# Altium PCB Copy of PCB1.PcbDoc
Units mil, origin at the board's own origin, x right, y up, seen from the top; angles counter-clockwise.
Board outline 6000 x 4000 mil, 2 copper layers (Top Layer, Bottom Layer); 12 components, 9 nets, 25 pads, 1 vias.
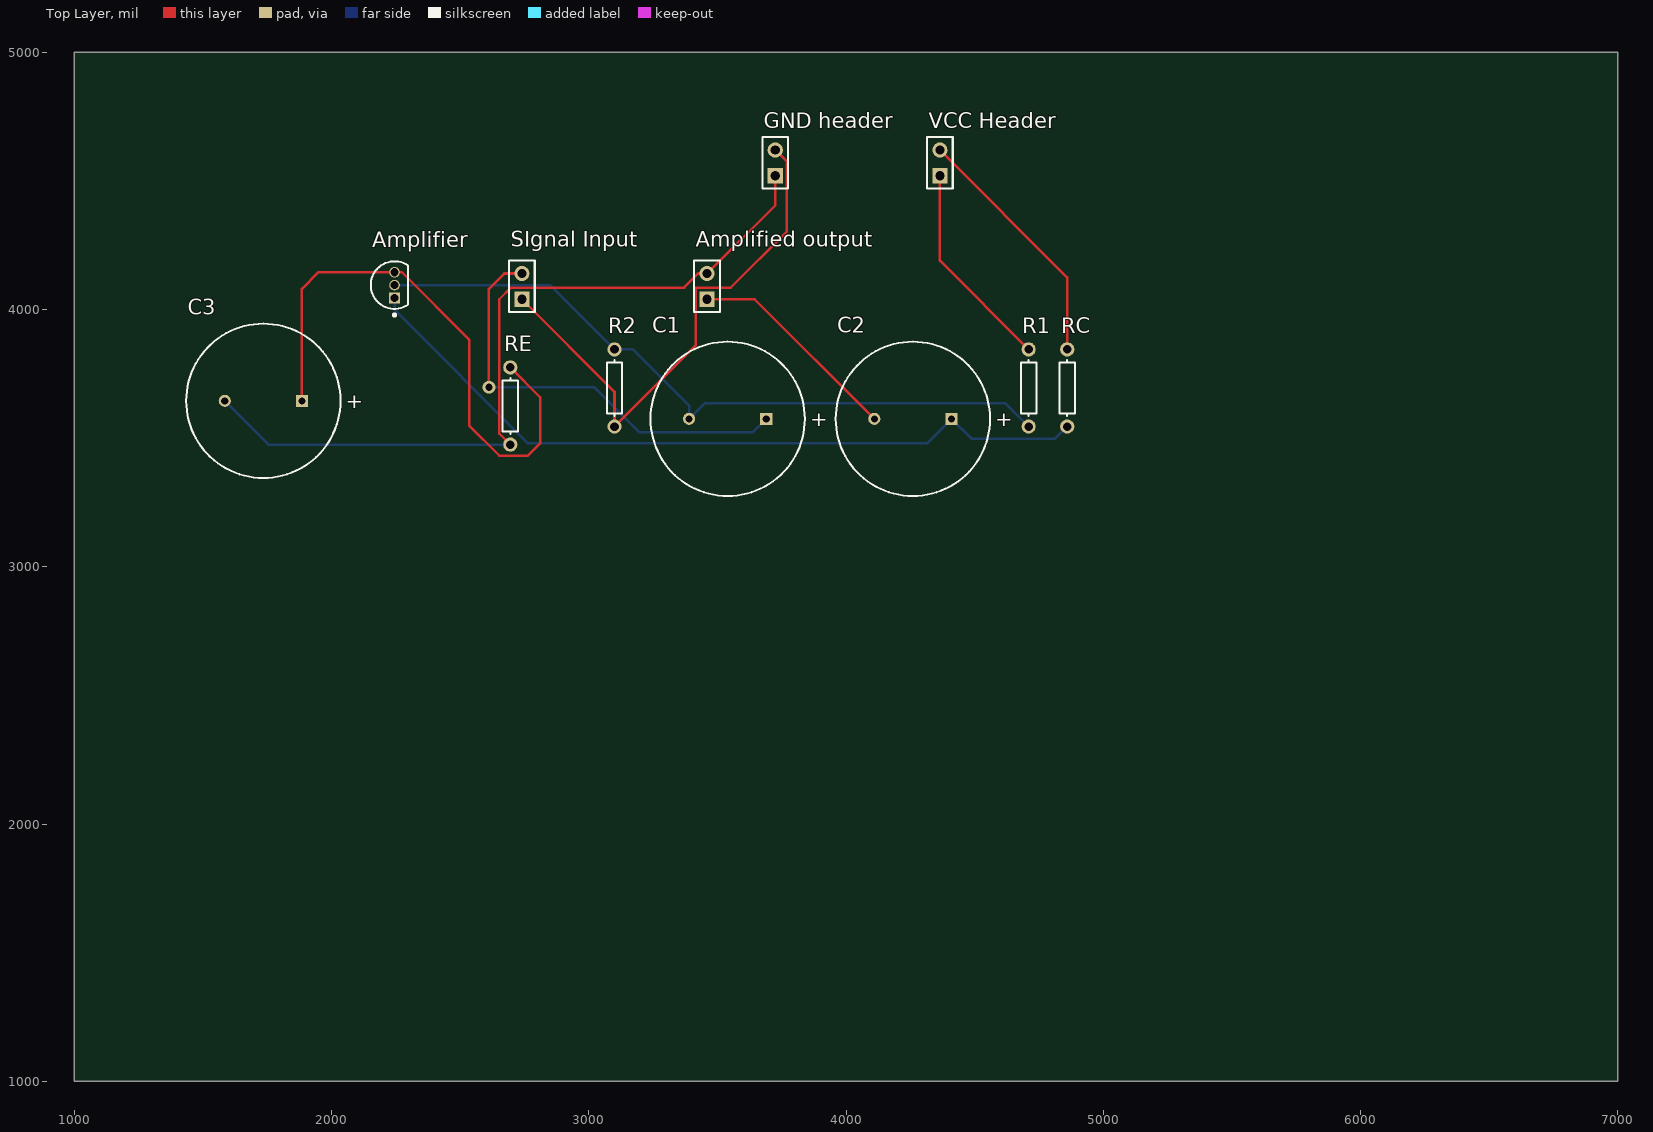
[diagram p0: Top Layer view]
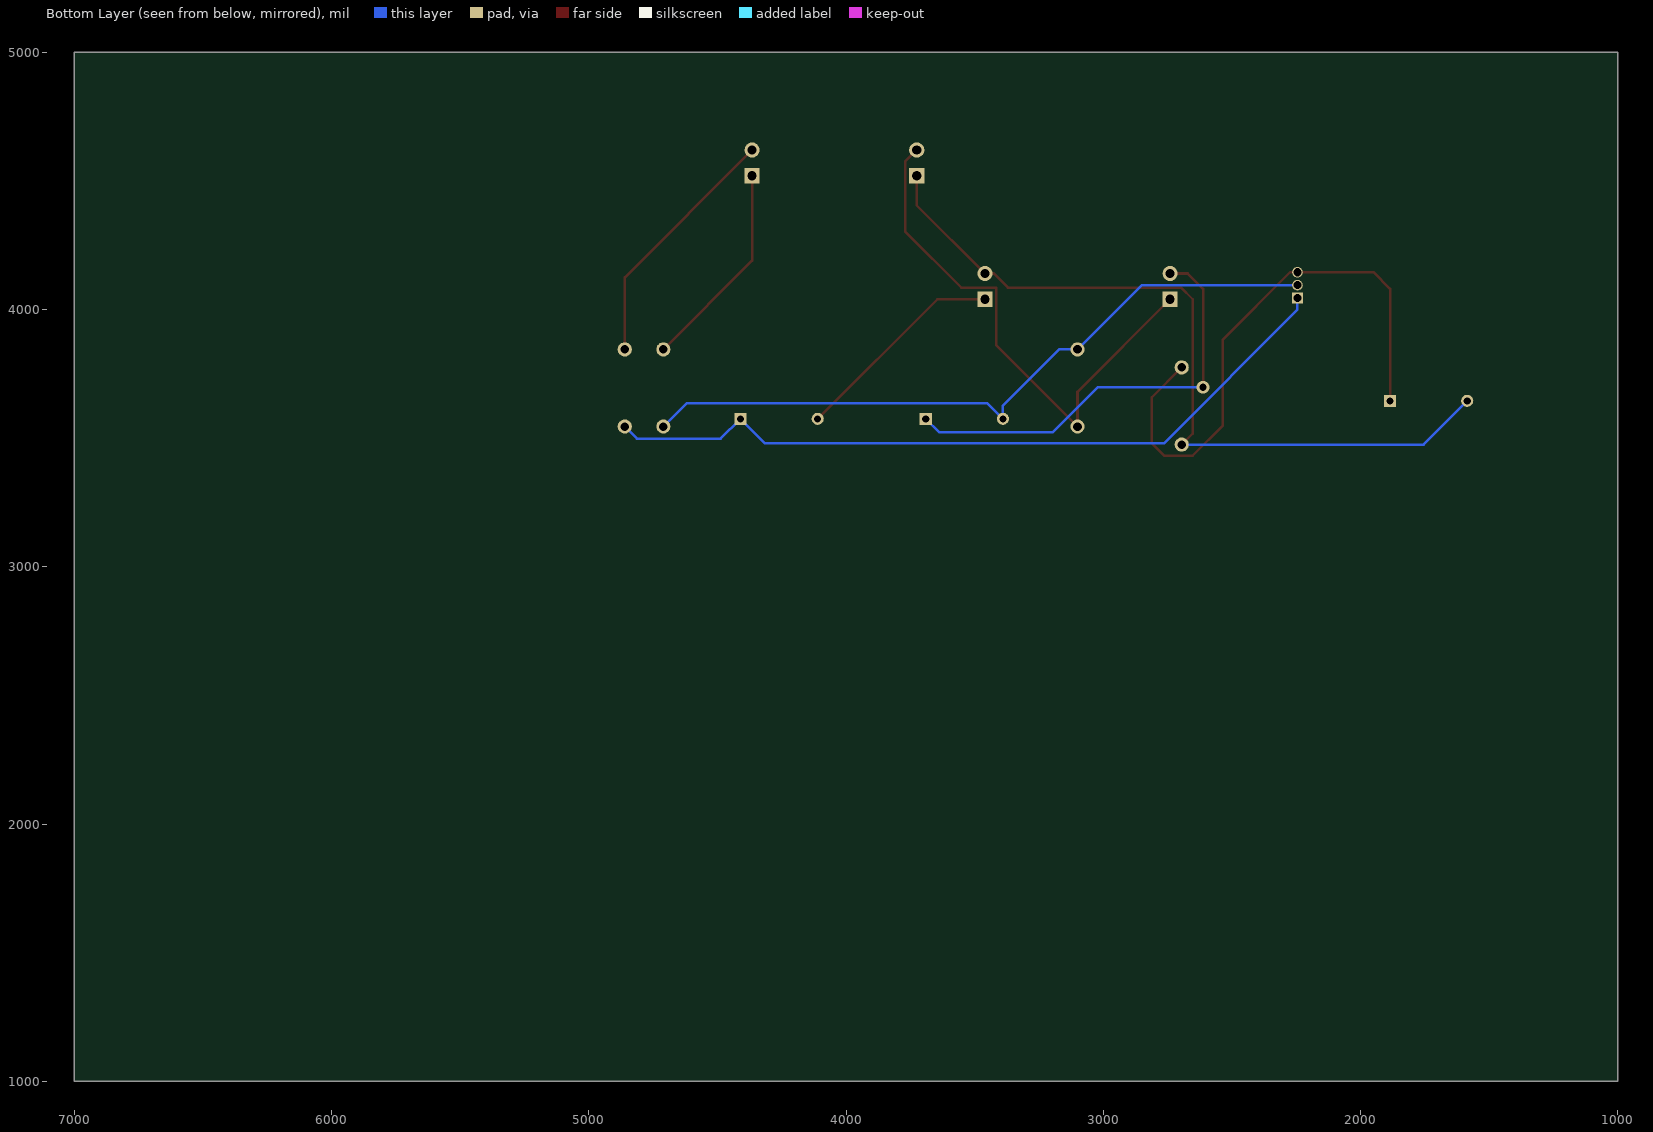
[diagram p1: Bottom Layer view, seen from below]

## Layer stack, top to bottom
Top Solder: solder mask 0.4, Solder Resist, Dk 3.5
Top Layer: signal copper 1.4
Dielectric 1: dielectric 12.6, FR-4, Dk 4.8
Bottom Layer: signal copper 1.4
Bottom Solder: solder mask 0.4, Solder Resist, Dk 3.5

## Board outline
1000,1000 7000,1000 7000,5000 1000,5000

## Design rules (kind name [scope] priority, off if disabled: settings)
Clearance [All] p1: gap=10 ignorepadtopadclearanceinfootprint=FALSE except(0: Arc-Hole Track-Hole SMDPad-Hole THPad-Hole Via-Hole Fill-Hole Poly-Hole Region-Hole Text-Hole)
PolygonConnect [All] p1: connectstyle=Relief reliefconductorwidth=10 reliefentries=4 polygonreliefangle="90 Angle" airgapwidth=10
RoomDefinition Sheet1 [InComponentClass('Sheet1')] p1: confinementstyle=ConfineIn formatcopy=TRUE lockcomponents=FALSE outline 1005,3155 4955,3155 4955,5015 1005,5015
RoutingVias [All] p1: holewidth=28 width=50 viastyle="Through Hole" minholewidth=28 minwidth=50 maxholewidth=28 maxwidth=50
SolderMaskExpansion [All] p1: expansion=4 istentingtop=FALSE
Width [All] p1: maxlimit=10 minlimit=10 preferedwidth=10
30 further rules are at their usual default settings.

## Components (designator, comment, footprint, x,y, rotation, side; value= is the part's Value field where it differs from the comment)
"Amplified output" "Header 2" HDR1X2 3460,4040 r90 top
Amplifier "BC547B" ONSC-TO-92-3-29-11 2245,4095 r90 top
C1 "Cap Pol1" RB7.6-15 3540,3575 r0 top value=10mu
C2 "Cap Pol1" RB7.6-15 4260,3575 r0 top value=10mu
C3 "Cap Pol1" RB7.6-15 1735,3645 r0 top value=100mu
"GND header" "Header 2" HDR1X2 3725,4520 r90 top
R1 "" AXIAL-0.3 4710,3695 r90 top value=10K
R2 "" AXIAL-0.3 3100,3695 r90 top value=2.2K
RC "" AXIAL-0.3 4860,3695 r90 top value=4.7K
RE "" AXIAL-0.3 2695,3625 r90 top value=1K
"SIgnal Input" "Header 2" HDR1X2 2740,4040 r90 top
"VCC Header" "Header 2" HDR1X2 4365,4520 r90 top

## Footprints (in the part's own frame and the unit in brackets; to place one, negate y for a bottom-side part, rotate by r counter-clockwise, add the part's x,y. Pads: shape width x height; smd on the part's side, far side on the other; paste and mask are expansions set on the pad)
AXIAL-0.3 [mm] "Axial Device, Thru-Hole; 2 Leads; 0.3 in Pin Spacing"
  round 1.4 hole 0.85: 1(-3.81,0) 2(3.81,0)
  silkscreen extent -2.77,-0.76 2.77,0.76
HDR1X2 [mm] "Connector; Header; 2 Position"
  rect 1.5x1.5 hole 0.9: 1(0,0)
  round 1.5 hole 0.9: 2(2.54,0)
  silkscreen extent -1.27,-1.27 3.81,1.27
ONSC-TO-92-3-29-11 [mm] "TO, 3-Leads, Body Dia 4.7mm, Pitch 1.27mm"
  rect 1.05x1.05 hole 0.8: 1(-1.27,0)
  round 1.05 hole 0.8: 2(0,0) 3(1.27,0)
  silkscreen extent -3.07,-1.34 2.35,2.35, body extent -2.35,-1.33 2.36,2.36, height 7.87
RB7.6-15 [mm] "Polarized Capacitor (Radial); 2 Leads"
  rect 1.2x1.2 hole 0.7: 1(3.81,0)
  round 1.2 hole 0.7: 2(-3.81,0)
  silkscreen extent -7.62,-7.62 7.62,7.62

## Part data
"Amplified output" "GND header" "SIgnal Input" "VCC Header": "Header, 2-Pin", LatestRevisionDate=17-Jul-2002, LatestRevisionNote="Re-released for DXP Platform.", Publisher="Altium Limited"
Amplifier: library part CMP-1048-01467-1, "Amplifier Transistor, NPN Silicon, 3-Pin TO-92, Bulk Box", Manufacturer="On Semiconductor", ComponentLink1Description="Manufacturer URL", ComponentLink1URL=http://www.onsemi.com/, ComponentLink2Description=Datasheet, ComponentLink2URL=http://www.onsemi.com/pub_link/Collateral/BC546-D.PDF, ComponentLink3Description="Package Specification", ComponentLink3URL=http://www.onsemi.cn/pub_link/Collateral/2N6426-D.PDF, DatasheetVersion="Rev. 7", fT Min (MHz)=150, IC Continuous (A)=0.1, Mounting Technology="Through Hole", PackageDescription="3-Pin Transistor Outline, Body 4.825 x 3.685 mm, Pitch 1.27 mm", PackageReference=TO-92-3-29-11_AM_SL, PackageVersion="Rev. AM", Packing="Bulk Box", PartNumber=BC547B, Polarity=NPN, RoHS=FALSE
C1 C2 C3: "Polarized Capacitor (Radial)", LatestRevisionDate=17-Jul-2002, LatestRevisionNote="Re-released for DXP Platform.", PackageDescription="Polarized Capacitor (Radial); 2 Leads", PackageReference=RB7.6-15, Published=8-Jun-2000, Publisher="Altium Limited"
R1 R2 RC RE: library part Res1, "Resistor", LatestRevisionDate=17-Jul-2002, LatestRevisionNote="Re-released for DXP Platform.", PackageDescription="Axial Device, Thru-Hole; 2 Leads; 0.3 in Pin Spacing", PackageReference=AXIAL-0.3, Published=8-Jun-2000, Publisher="Altium Limited"

## Via types
v1: diameter 50, hole 28, Top Layer to Bottom Layer, 1 vias

## Nets (pads, with @x,y where several pads share a name; then routed paths per layer and width w, separated by ;. In a path a pad name is that pad's centre, name@x,y a point inside that pad or via, vN(x,y) a via of type N, cw(c..) or ccw(c..) an arc to the next point about the centre after c; other vN are vias at no path point)
"Net  VCC Header_1": "VCC Header.1" R1.2 | length 817.9
  Top Layer w10: 4365,4520 4365,4190 R1.2
"Net  VCC Header_2": "VCC Header.2" RC.2 | length 980
  Top Layer w10: 4365,4620 4860,4125 RC.2
"NetAmplified output_1": "Amplified output.1" C2.2 | length 842.6
  Top Layer w10: 3460,4040 3645,4040 C2.2
"NetAmplified output_2": "Amplified output.2" "GND header.1" C3.2 RE.1 | length 3102.4
  Top Layer w10: RE.1 2652,3518 2652,4040 2697,4085 3370.47,4085 3425.47,4140 3460,4140 3725,4405 3725,4520
  Bottom Layer w10: C3.2 1755,3475 RE.1
NetAmplifier_1: Amplifier.1 C2.1 RC.1 | length 2966.3
  Bottom Layer w10: Amplifier.1 2245,3999.66 2764.66,3480 4315,3480 C2.1 4487,3498 4813,3498 RC.1
NetAmplifier_2: Amplifier.2 C1.2 R1.1 R2.2 | length 2773
  Bottom Layer w10: Amplifier.2 2850,4095 R2.2 3171.27,3845 3390,3626.27 C1.2 3450.48,3635.48 4619.52,3635.48 R1.1
NetAmplifier_3: Amplifier.3 C3.1 RE.2 | length 2241.8
  Top Layer w10: C3.1 1885,4080 1950,4145 Amplifier.3 2273,4145 2535,3883 2535,3549 2652,3432 2763,3432 2811,3480 2811,3659 RE.2
NetC1_1: "SIgnal Input.2" C1.1 | length 1706.9
  Top Layer w10: v1(2612,3698) 2612,4080 2672,4140 2740,4140
  Bottom Layer w10: v1(2612,3698) 3021,3698 3196,3523 3638,3523 C1.1
"NetGND header_2": "GND header.2" "SIgnal Input.1" R2.1 | length 2095.3
  Top Layer w10: 2740,4040 3100,3680 R2.1 3415.47,3860.47 3415.47,4085 3552,4085 3770,4303 3770,4575 3725,4620

## Dimensions
1015,5020 to 4960,5065 on Bottom Layer

## Text inside footprints (layer, text, board x,y; h text height)
C1: Top Overlay "+" at 3860.15,3545.99 h59.06
C2: Top Overlay "+" at 4580.15,3545.99 h59.06
C3: Top Overlay "+" at 2055.15,3615.99 h59.06